# Altium PCB BugBusterMain.PcbDoc (part 6 of 6)
Units mm, origin at the board's own origin, x right, y up, seen from the top; angles counter-clockwise.
Board outline 110 x 80 mm, 6 copper layers (Top Layer, Inner Layer 1, Inner Layer 2, Inner Layer 3, Inner Layer 4, Bottom Layer), stack 1.546 mm thick; 244 components, 246 nets, 1173 pads, 1169 vias.
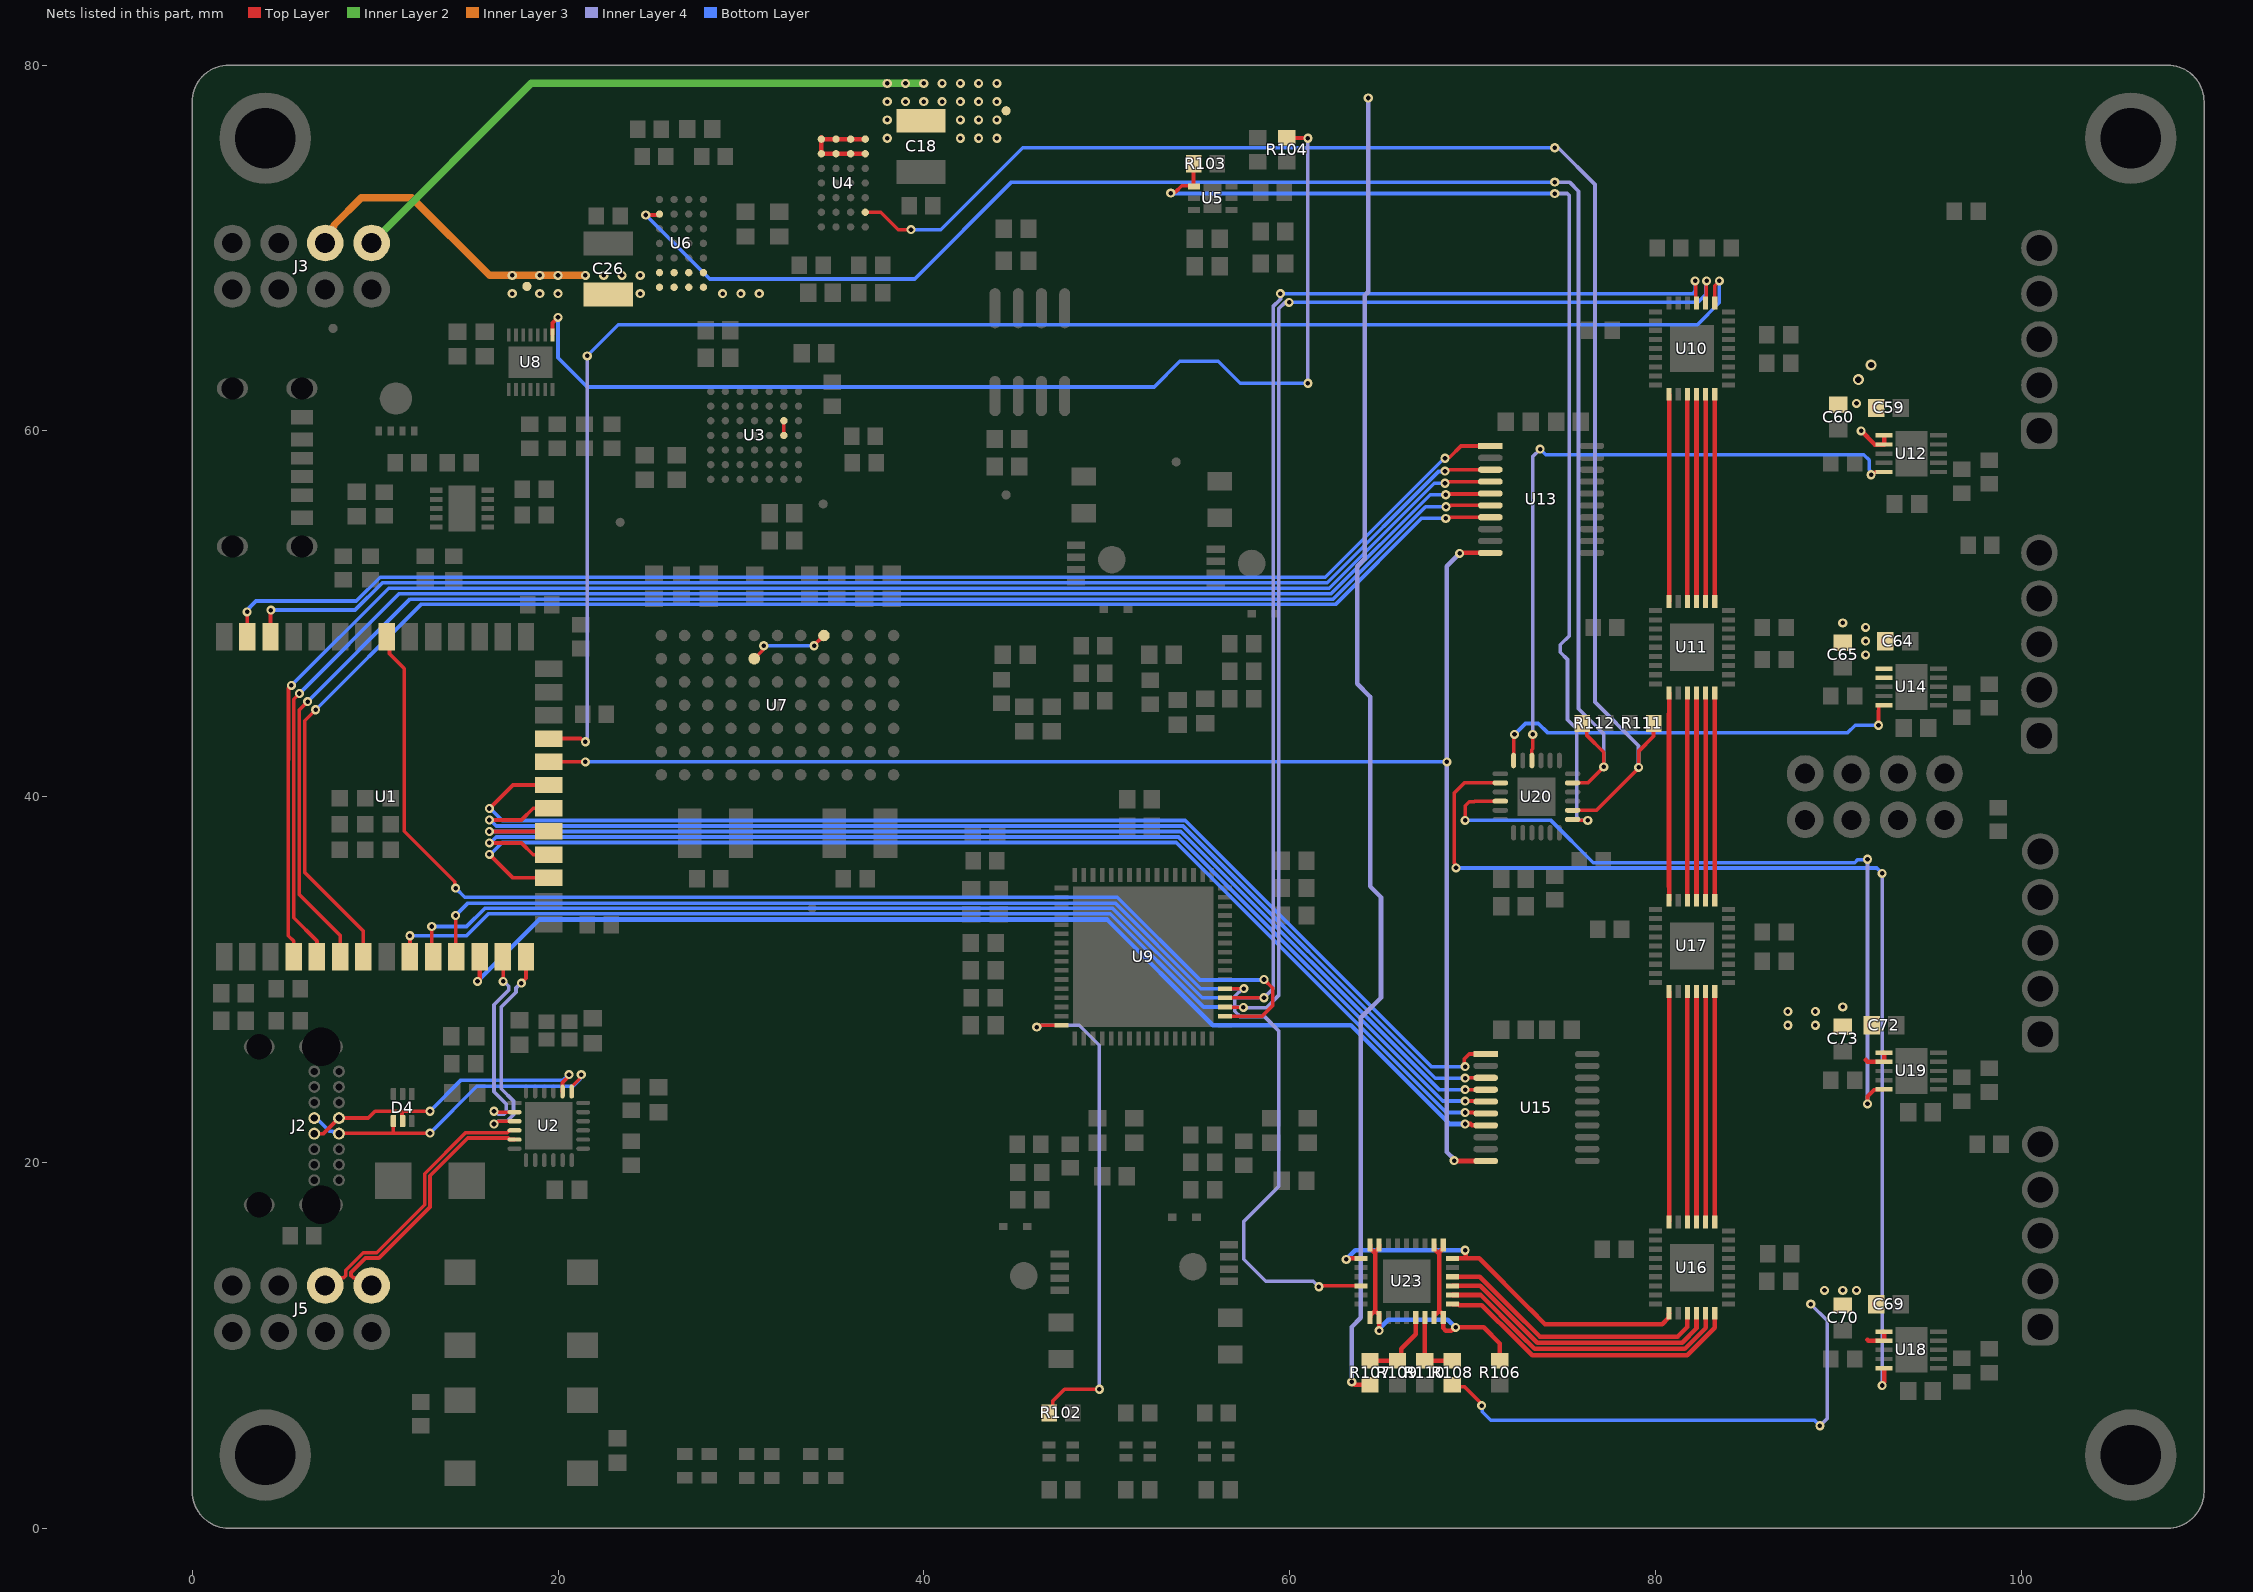
[diagram p8: the nets of this part, all layers, seen from the top]

## Via types
v1: diameter 0.6, hole 0.35, Top Layer to Bottom Layer, tented both sides, 608 vias
v2: diameter 0.5, hole 0.25, Top Layer to Bottom Layer, tented both sides, 555 vias
v3: diameter 0.45, hole 0.25, Top Layer to Bottom Layer, tented both sides, 6 vias

## Nets (pads, with @x,y where several pads share a name; then routed paths per layer and width w, separated by ;. In a path a pad name is that pad's centre, name@x,y a point inside that pad or via, vN(x,y) a via of type N, cw(c..) or ccw(c..) an arc to the next point about the centre after c; other vN are vias at no path point) (continued)
NetR102_1: R102.1 U9.32 | length 27.7
  Top Layer w0.2: v2(46.177,27.4) 46.258,27.4 46.358,27.5 U9.32@47.53,27.5 ; R102.1@46.85,6.3 47.058,6.508 47.058,6.958 47.7,7.6 v2(49.6,7.6)
  Inner Layer 4 w0.2: v2(46.177,27.4) 46.234,27.457 46.402,27.457 46.444,27.5 48.5,27.5 49.6,26.4 v2(49.6,7.6)
NetR103_2: R103.2 U5.4 U20.1 | length 60.6
  Top Layer w0.2: v2(53.5,73) 53.557,73.057 53.757,73.057 54.1,73.4 54.733,73.4 U5.4@54.765,73.368 54.75,73.383 R103.2@54.75,74.6 ; U20.1@75.475,38.75 75.784,38.75 75.834,38.7 v2(76.3,38.7)
  Inner Layer 4 w0.2: v2(74.5,72.973) 75.183,72.973 75.3,72.856 75.3,48.8 74.8,48.3 74.8,47.9 75.2,47.5 75.2,44.2 75.7,43.7 75.7,38.9 75.9,38.7 v2(76.3,38.7)
  Bottom Layer w0.2: v2(53.5,73) 53.527,72.973 v2(74.5,72.973)
NetR104_2: R104.2 U8.8 | length 60.6
  Top Layer w0.2: U8.8@19.7,65.249 19.7,65.9 v2(20,66.2) ; R104.2@59.856,76.014 60.986,76.014 v2(61,76)
  Inner Layer 4 w0.2: v2(61,62.6) v2(61,76)
  Bottom Layer w0.2: v2(20,66.2) 20,64 21.6,62.4 52.6,62.4 54,63.8 56.1,63.8 57.3,62.6 v2(61,62.6)
NetR106_1: R106.1 U23.1 U23.2 U23.8 U23.9 U23.16 U23.17 U23.23 U23.24 | length 21.2
  Top Layer w0.25: U23.16@64.4,11.509 64.4,11.722 64.415,11.737 64.529,11.737 64.675,11.883 ; U23.9@64.4,15.492 64.4,15.278 64.415,15.263 64.437,15.263 64.675,15.025 ; v2(64.898,10.8) 64.9,10.8 64.9,11.722 64.885,11.737 64.821,11.737 64.675,11.883 ; U23.8@64.9,15.492 64.9,15.278 64.885,15.263 64.821,15.263 64.675,15.117 64.675,15.025 ; U23.23@67.9,11.509 67.9,11.722 67.915,11.737 68.054,11.737 68.2,11.883 68.346,11.737 68.385,11.737 68.4,11.722 68.4,10.946 68.546,10.8 68.83,10.8 69.007,10.977 70.623,10.977 71.5,10.1 R106.1@71.5,9.15 ; U23.2@67.9,15.278 U23.2@67.9,15.492 ; U23.2@67.915,15.263 68.088,15.09 68.18,15.09 ; 68.18,11.863 68.18,15.09 ; U23.1@68.4,15.492 68.4,15.278 68.385,15.263 68.354,15.263 68.18,15.09 ; 64.675,11.883 64.675,15.025
  Bottom Layer w0.25: v2(64.898,10.8) 64.898,10.868 65.023,10.993 65.023,11.023 65.4,11.4 68.652,11.4 v2(69.075,10.977)
NetR107_1: R107.1 R109.2 U23.21 | length 4.3
  Top Layer w0.25: R107.1@64.4,9.15 R109.2@65.9,9.15 66.104,9.354 66.104,9.804 66.9,10.6 U23.21@66.9,11.509
NetR108_1: R108.1 R110.2 U23.22 | length 3.9
  Top Layer w0.25: U23.22@67.4,11.509 R110.2@67.4,9.15 R108.1@68.9,9.15
NetR111_1: R111.1 U4.B1 U20.2 | length 83.2
  Top Layer w0.2: U4.B1@36.8,71.95 37.65,71.95 38.6,71 v2(39.3,71) ; U20.2@75.475,39.25 76.779,39.25 79.081,41.552 v2(79.081,41.6) 79.1,41.619 79.1,42.5 79.9,43.3 R111.1@79.9,44
  Inner Layer 4 w0.2: v2(74.5,75.481) 74.692,75.481 76.7,73.473 76.7,45.169 79.081,42.788 v2(79.081,41.6)
  Bottom Layer w0.2: v2(39.3,71) 40.927,71 45.408,75.481 v2(74.5,75.481)
NetR112_1: R112.1 U6.B1 U20.5 | length 92.6
  Top Layer w0.2: v2(24.8,71.8) 25.359,71.8 25.37,71.812 25.512,71.812 U6.B1@25.55,71.85 ; U20.5@75.475,40.75 76.302,40.75 v2(77.176,41.624) 77.176,42.424 76.258,43.342 76.258,43.742 R112.1@76,44
  Inner Layer 4 w0.2: v2(74.5,73.6) 75.3,73.6 75.8,73.1 75.8,44.809 76.789,43.82 76.789,43.807 77.176,43.42 v2(77.176,41.624)
  Bottom Layer w0.2: v2(24.8,71.8) 28.3,68.3 39.5,68.3 44.8,73.6 v2(74.5,73.6)
NetU1_4: U1.4 U13.4 | length 85.2
  Top Layer w0.2: v2(5.42,46.08) 5.261,45.921 5.261,42.011 5.25,42 5.25,32.4 5.55,32.1 U1.4@5.55,31.25 ; v2(68.5,57.131) 68.581,57.131 68.675,57.225 U13.4@70.975,57.225
  Bottom Layer w0.2: v2(5.42,46.08) 10.74,51.4 62.174,51.4 67.905,57.131 v2(68.5,57.131)
NetU1_5: U1.5 U13.5 | length 84.7
  Top Layer w0.2: v2(5.863,45.637) 5.55,45.323 5.55,33.37 6.82,32.1 U1.5@6.82,31.25 ; v2(68.538,56.504) 68.582,56.548 70.948,56.548 U13.5@70.975,56.575
  Bottom Layer w0.2: v2(5.863,45.637) 11.327,51.1 62.283,51.1 67.687,56.504 v2(68.538,56.504)
NetU1_6: U1.6 U13.6 | length 84.2
  Top Layer w0.2: v2(6.307,45.193) 5.85,44.737 5.85,34.65 8.09,32.41 U1.6@8.09,31.25 ; v2(68.555,55.847) 68.612,55.904 68.801,55.904 68.822,55.925 U13.6@70.975,55.925
  Bottom Layer w0.2: v2(6.307,45.193) 11.913,50.8 62.391,50.8 67.438,55.847 v2(68.555,55.847)
NetU1_7: U1.7 U13.7 | length 83.7
  Top Layer w0.2: v2(6.75,44.75) 6.15,44.15 6.15,35.85 9.36,32.64 U1.7@9.36,31.25 ; v2(68.536,55.214) 68.593,55.272 68.8,55.272 68.803,55.275 U13.7@70.975,55.275
  Bottom Layer w0.2: v2(6.75,44.75) 12.511,50.511 62.511,50.511 67.214,55.214 v2(68.536,55.214)
NetU1_9: U1.9 U9.51 U10.26 | length 115.8
  Top Layer w0.2: U1.9@11.9,31.25 11.905,31.255 v2(11.905,32.395) ; U9.51@56.47,28.5 56.482,28.488 57.466,28.488 v2(57.477,28.477) ; U10.26@82.75,66.999 82.79,67.04 82.79,68.19 v2(82.8,68.2)
  Inner Layer 4 w0.2: v2(57.477,28.477) 57.492,28.462 58.737,28.462 59.4,29.125 59.4,66.676 59.747,67.022 v2(59.978,67.022)
  Bottom Layer w0.2: v2(11.905,32.395) 14.995,32.395 16.2,33.6 50.2,33.6 55.3,28.5 57.454,28.5 v2(57.477,28.477) ; v2(59.978,67.022) 82.322,67.022 82.765,67.465 82.765,68.165 v2(82.8,68.2)
NetU1_10: U1.10 U9.52 U10.27 | length 115.2
  Top Layer w0.2: v2(13.1,32.9) 13.1,31.32 U1.10@13.17,31.25 ; U9.52@56.47,29 v2(58.6,29) ; v2(82.173,68.2) 82.212,68.161 82.212,66.925 U10.27@82.233,66.903
  Inner Layer 4 w0.2: v2(58.6,29) 59.1,29.5 59.1,66.8 59.5,67.2 v2(59.5,67.5)
  Bottom Layer w0.2: v2(13.1,32.9) 15,32.9 15.989,33.889 50.335,33.889 55.224,29 v2(58.6,29) ; v2(59.5,67.5) 82.056,67.5 82.173,67.617 v2(82.173,68.2)
NetU1_11: U1.11 U9.53 U23.13 | length 73.3
  Top Layer w0.2: v2(14.4,33.5) 14.4,31.29 U1.11@14.44,31.25 ; U9.53@56.47,29.5 v2(57.5,29.5) ; v2(61.6,13.2) 61.65,13.25 U23.13@63.9,13.25
  Inner Layer 4 w0.2: v2(57.5,29.5) 57.422,29.5 57,29.079 57,28.265 57.288,27.977 58.623,27.977 59.4,27.2 59.4,18.675 57.5,16.775 57.5,14.7 58.7,13.5 61.3,13.5 v2(61.6,13.2)
  Bottom Layer w0.2: v2(14.4,33.5) 15.078,34.178 50.471,34.178 55.149,29.5 v2(57.5,29.5)
NetU1_12: U1.12 U15.7 | length 62.6
  Top Layer w0.25: v2(15.6,29.9) 15.71,30.01 U1.12@15.71,31.25 ; v2(69.6,22.1) 69.9,22.1 69.975,22.025 U15.7@70.725,22.025
  Bottom Layer w0.25: v2(15.6,29.9) 18.98,33.28 50.02,33.28 55.8,27.5 63.356,27.5 68.756,22.1 v2(69.6,22.1)
NetU1_17: U1.17 U15.6 | length 64.7
  Top Layer w0.2: v2(16.25,36.841) 17.536,35.555 U1.17@19.5,35.555 ; v2(69.6,22.727) 70.066,22.727 70.091,22.702 70.698,22.702 U15.6@70.725,22.675
  Bottom Layer w0.2: v2(16.25,36.841) 16.298,36.841 16.727,37.27 16.952,37.495 53.805,37.495 68.573,22.727 v2(69.6,22.727)
NetU1_18: U1.18 U15.5 | length 64.1
  Top Layer w0.2: v2(16.25,37.468) 18.007,37.468 18.65,36.825 U1.18@19.5,36.825 ; v2(69.6,23.354) 70.089,23.354 70.091,23.352 70.698,23.352 U15.5@70.725,23.325
  Bottom Layer w0.2: v2(16.25,37.468) 16.298,37.468 16.625,37.795 53.929,37.795 68.37,23.354 v2(69.6,23.354)
NetU1_19: U1.19 U15.4 | length 63.6
  Top Layer w0.2: v2(16.25,38.095) U1.19@19.5,38.095 ; v2(69.6,23.981) 70.719,23.981 U15.4@70.725,23.975
  Bottom Layer w0.2: v2(16.25,38.095) 54.054,38.095 68.168,23.981 v2(69.6,23.981)
NetU1_20: U1.20 U15.3 | length 63.8
  Top Layer w0.2: v2(16.25,38.722) 18.007,38.722 18.65,39.365 U1.20@19.5,39.365 ; v2(69.6,24.608) 69.617,24.625 U15.3@70.725,24.625
  Bottom Layer w0.2: v2(16.25,38.722) 16.298,38.722 16.625,38.395 54.178,38.395 67.965,24.608 v2(69.6,24.608)
NetU1_21: U1.21 U15.1 | length 64.7
  Top Layer w0.2: v2(16.25,39.349) 17.536,40.635 U1.21@19.5,40.635 ; v2(69.6,25.235) 69.556,25.279 69.556,25.656 69.825,25.925 U15.1@70.725,25.925
  Bottom Layer w0.2: v2(16.25,39.349) 16.298,39.349 16.952,38.695 54.302,38.695 67.762,25.235 v2(69.6,25.235)
NetU1_22: U1.22 U13.10 U15.10 | length 86.2
  Top Layer w0.2: U1.22@19.5,41.905 21.495,41.905 v2(21.5,41.9)
  Top Layer w0.25: v2(69,20.1) 69.025,20.075 U15.10@70.725,20.075 ; v2(69.3,53.3) 69.325,53.325 U13.10@70.975,53.325
  Inner Layer 4 w0.25: v2(69,20.1) 69,20.168 68.598,20.57 68.598,52.598 v2(69.3,53.3)
  Bottom Layer w0.2: v2(21.5,41.9) v2(68.6,41.9)
NetU1_23: U1.23 U10.25 | length 88.8
  Top Layer w0.2: U1.23@19.5,43.175 21.244,43.175 21.419,43 v2(21.5,43) ; U10.25@83.25,66.999 83.25,67.933 83.5,68.183 v2(83.5,68.2)
  Inner Layer 4 w0.2: v2(21.5,43) 21.5,43.081 21.6,43.181 v2(21.6,64.1)
  Bottom Layer w0.2: v2(21.6,64.1) 23.3,65.8 82.3,65.8 83.5,67 v2(83.5,68.2)
NetU1_33: U1.33 U9.50 | length 66.1
  Top Layer w0.2: U1.33@10.63,48.75 10.783,48.597 10.783,47.817 11.6,47 11.6,38.1 14.361,35.339 14.361,35.039 v2(14.4,35) ; U9.50@56.47,28 58.5,28 59.077,28.577 59.077,29.523 v2(58.6,30)
  Bottom Layer w0.2: v2(14.4,35) 14.9,34.5 50.583,34.5 55.106,29.977 58.577,29.977 v2(58.6,30)
NetU1_38: U1.38 U13.3 | length 71.3
  Top Layer w0.2: U1.38@4.28,48.75 4.28,50.18 v2(4.3,50.2) ; v2(68.5,57.8) 68.581,57.8 68.656,57.875 U13.3@70.975,57.875
  Bottom Layer w0.2: v2(4.3,50.2) 8.9,50.2 10.4,51.7 62.066,51.7 68.144,57.778 68.478,57.778 v2(68.5,57.8)
NetU1_39: U1.39 U13.1 | length 73.2
  Top Layer w0.2: v2(3,50.1) 3.01,50.09 U1.39@3.01,48.75 ; v2(68.5,58.5) 68.557,58.557 68.757,58.557 69.375,59.175 U13.1@70.975,59.175
  Bottom Layer w0.2: v2(3,50.1) 3,50.181 3.131,50.312 3.131,50.347 3.484,50.7 8.976,50.7 10.276,52 61.957,52 68.457,58.5 v2(68.5,58.5)
NetU3_C6: U3.C6 U3.D6 | length 0.8
  Top Layer w0.2: U3.D6@32.35,59.75 U3.C6@32.35,60.55
NetU7_E6: U7.E6 U7.H7 | length 4.5
  Top Layer w0.2: U7.E6@30.73,47.54 31.193,48.003 31.193,48.193 v2(31.25,48.25) ; v2(34,48.25) 34,48.27 U7.H7@34.54,48.81
  Bottom Layer w0.2: v2(31.25,48.25) v2(34,48.25)
NetU10_10: U10.10 U11.30 | length 11.3
  Top Layer w0.25: U11.30@80.75,50.666 U10.10@80.75,62
NetU10_12: U10.12 U11.28 | length 11.3
  Top Layer w0.25: U11.28@81.75,50.666 U10.12@81.75,62
NetU10_13: U10.13 U11.27 | length 11.3
  Top Layer w0.25: U11.27@82.25,50.666 U10.13@82.25,62
NetU10_14: U10.14 U11.26 | length 11.3
  Top Layer w0.25: U11.26@82.75,50.666 U10.14@82.75,62
NetU10_15: U10.15 U11.25 | length 11.3
  Top Layer w0.25: U11.25@83.25,50.666 U10.15@83.25,62
NetU11_10: U11.10 U17.30 | length 11.3
  Top Layer w0.25: U17.30@80.75,34.333 80.75,35.061 80.746,35.065 80.746,44.531 80.75,44.535 U11.10@80.75,45.667
NetU11_12: U11.12 U17.28 | length 11.3
  Top Layer w0.25: U17.28@81.75,34.333 81.75,39.546 81.752,39.548 81.752,44.533 81.75,44.535 U11.12@81.75,45.667
NetU11_13: U11.13 U17.27 | length 11.3
  Top Layer w0.25: U17.27@82.25,34.333 U11.13@82.25,45.667
NetU11_14: U11.14 U17.26 | length 11.3
  Top Layer w0.25: U17.26@82.75,34.333 U11.14@82.75,45.667
NetU11_15: U11.15 U17.25 | length 11.3
  Top Layer w0.25: U17.25@83.25,34.333 U11.15@83.25,45.667
NetU12_5: U12.5 U20.10 | length 37.1
  Top Layer w0.2: U20.10@73.25,41.975 73.237,41.988 73.237,42.563 73.3,42.625 v2(73.3,43.4) ; v2(91.8,57.6) 91.881,57.6 92.012,57.73 92.49,57.73 U12.5@92.509,57.75
  Inner Layer 4 w0.2: v2(73.3,43.4) 73.3,58.6 v2(73.7,59)
  Bottom Layer w0.2: v2(73.7,59) 74,58.7 91.4,58.7 91.7,58.4 91.7,57.867 91.743,57.825 91.743,57.657 v2(91.8,57.6)
NetU14_5: U14.5 U20.12 | length 23.4
  Top Layer w0.2: U20.12@72.25,41.975 72.25,43.35 v2(72.3,43.4) ; v2(92.2,43.9) 92.2,44.691 92.207,44.698 92.207,44.98 92.227,45 U14.5@92.509,45
  Bottom Layer w0.2: v2(72.3,43.4) 72.9,44 73.6,44 74.1,43.5 90.525,43.5 90.925,43.9 v2(92.2,43.9)
NetU16_10: U16.10 U23.10 U23.30 | length 21.7
  Top Layer w0.25: v2(63.1,14.7) 63.168,14.7 63.218,14.75 U23.10@63.9,14.75 ; U23.30@68.899,14.75 69.631,14.75 ; v2(69.6,15.2) 69.631,15.169 69.631,14.75 ; U16.10@80.75,11.75 80.735,11.735 80.735,11.522 80.368,11.156 73.966,11.156 73.152,11.969 73.143,11.969 70.363,14.75 69.631,14.75
  Bottom Layer w0.25: v2(63.1,14.7) 63.6,15.2 v2(69.6,15.2)
NetU16_12: U16.12 U23.28 | length 15.2
  Top Layer w0.25: U23.28@68.899,13.75 70.404,13.75 72.863,11.292 72.871,11.292 73.685,10.478 81.228,10.478 81.75,11 U16.12@81.75,11.75
NetU16_13: U16.13 U23.27 | length 15.8
  Top Layer w0.25: U23.27@68.899,13.25 70.425,13.25 72.722,10.953 72.731,10.953 73.545,10.139 81.462,10.139 82.25,10.927 U16.13@82.25,11.75
NetU16_14: U16.14 U23.26 | length 16.4
  Top Layer w0.25: U23.26@68.899,12.75 70.446,12.75 72.582,10.614 72.59,10.614 73.404,9.8 81.602,9.8 82.75,10.948 U16.14@82.75,11.75
NetU16_15: U16.15 U23.25 | length 16.9
  Top Layer w0.25: U23.25@68.899,12.25 68.915,12.235 69.231,12.235 69.266,12.2 70.516,12.2 72.441,10.275 72.45,10.275 73.275,9.45 81.75,9.45 83.25,10.95 U16.15@83.25,11.75
NetU16_25: U16.25 U17.15 | length 12.6
  Top Layer w0.25: U16.25@83.25,16.749 U17.15@83.25,29.334
NetU16_26: U16.26 U17.14 | length 12.6
  Top Layer w0.25: U16.26@82.75,16.749 U17.14@82.75,29.334
NetU16_27: U16.27 U17.13 | length 12.6
  Top Layer w0.25: U16.27@82.25,16.749 U17.13@82.25,29.334
NetU16_28: U16.28 U17.12 | length 12.6
  Top Layer w0.25: U16.28@81.75,16.749 U17.12@81.75,29.334
NetU16_30: U16.30 U17.10 | length 12.6
  Top Layer w0.25: U16.30@80.75,16.749 U17.10@80.75,29.334
NetU18_5: U18.5 U20.14 | length 59.3
  Top Layer w0.2: v2(69.1,36.1) 69.043,36.157 69.043,36.325 69,36.367 69,40.2 69.55,40.75 U20.14@71.525,40.75
  Top Layer w0.25: v2(92.4,7.8) 92.4,7.868 92.509,7.977 U18.5@92.509,8.75
  Inner Layer 4 w0.2: v2(92.4,7.8) v2(92.4,35.8)
  Bottom Layer w0.2: v2@69.168,36.1 92.1,36.1 v2(92.4,35.8)
  Bottom Layer w0.25: v2(69.1,36.1) v2@69.168,36.1 ; v2@92.386,35.786 v2(92.4,35.8)
NetU19_5: U19.5 U20.16 | length 40.7
  Top Layer w0.2: v2(69.6,38.7) 69.6,39.5 69.823,39.723 70.098,39.723 70.125,39.75 U20.16@71.525,39.75 ; v2(91.6,23.2) 91.6,23.6 91.98,23.98 92.49,23.98 U19.5@92.509,24
  Inner Layer 4 w0.2: v2(91.6,23.2) v2(91.6,36.577)
  Bottom Layer w0.2: v2(69.6,38.7) 74.3,38.7 76.611,36.389 90.898,36.389 91.05,36.541 91.564,36.541 v2(91.6,36.577)
USB_DF1_N: U1.13 U2.2 | length 11.2
  Top Layer w0.2: v2(16.5,22.8) 16.55,22.75 U2.2@17.624,22.75 ; U1.13@16.98,31.25 17,31.23 v2(17,29.9)
  Inner Layer 4 w0.2: v2(16.5,22.8) 16.581,22.8 16.731,22.65 17.05,22.65 17.167,22.767 17.167,23.193 16.5,23.861 16.5,28.622 17.057,29.179 17.3,29.422 17.3,29.633 17.033,29.9 v2(17,29.9)
USB_DF1_P: U1.14 U2.3 | length 12
  Top Layer w0.2: v2(16.5,22.1) 16.581,22.1 16.731,22.25 U2.3@17.624,22.25 ; v2(18,29.8) 18,29.817 18.25,30.067 U1.14@18.25,31.25
  Inner Layer 4 w0.2: v2(16.5,22.1) 16.581,22.1 16.731,22.25 17.216,22.25 17.567,22.601 17.567,23.359 16.9,24.026 16.9,28.5 17.7,29.3 17.7,29.533 17.967,29.8 v2(18,29.8)
USB_DF2_N: J5.2 U2.4 | length 15
  Top Layer w0.2: J5.2@7.27,13.27 7.757,13.27 8.187,13.7 8.278,13.7 8.396,13.817 8.396,14.103 9.352,15.059 10.087,15.059 12.711,17.683 12.711,19.387 14.945,21.62 17.223,21.62 17.353,21.75 U2.4@17.624,21.75
USB_DF2_P: J5.1 U2.5 | length 14.5
  Top Layer w0.2: J5.1@9.81,13.27 9.323,13.27 8.893,13.7 8.802,13.7 8.684,13.817 8.684,13.983 9.472,14.77 10.207,14.77 13,17.563 13,19.267 15.064,21.332 17.271,21.332 17.353,21.25 U2.5@17.624,21.25
USB_UP_N: D4.1 J2.A7 J2.B7 U2.19 | length 18.2
  Top Layer w0.2: J2.A7@8.025,21.575 8.05,21.6 11,21.6 ; D4.1@11,22.26 11,21.6 ; v2(13,21.6) 11,21.6 ; U2.19@20.75,23.876 20.75,24.136 21.216,24.602 21.216,24.743 v2(21.273,24.8)
  Bottom Layer w0.2: J2.B7@6.675,22.425 6.775,22.425 7.5,21.7 7.683,21.7 7.722,21.661 7.939,21.661 J2.A7@8.025,21.575 ; v2(13,21.6) 15.561,24.161 20.827,24.161 21.216,24.55 21.216,24.743 v2(21.273,24.8)
USB_UP_P: D4.2 J2.A6 J2.B6 U2.20 | length 16.9
  Top Layer w0.2: J2.B6@6.675,21.575 7.175,21.575 J2.A6@8.025,22.425 9.625,22.425 10,22.8 11.383,22.8 ; D4.2@11.5,22.26 11.471,22.289 11.471,22.712 11.383,22.8 ; v2(13,22.8) 11.471,22.8 11.383,22.8 ; U2.20@20.25,23.876 20.25,24.372 20.6,24.722 v2(20.6,24.8)
  Bottom Layer w0.2: v2(13,22.8) 14.7,24.5 20.3,24.5 v2(20.6,24.8)
VADJ1_BUCK: C18.2 C59.2 C60.2 C64.2 C65.2 J3.1 pad.10 R107.2 U4.F1 U4.F2 U4.F3 U4.F4 U4.G1 U4.G2 U4.G3 U4.G4 U12.1 U12.2 U14.1 U14.2 | length 114.3
  Top Layer w0.25: U4.F1@36.8,75.15 U4.F2@36,75.15 U4.F3@35.2,75.15 U4.F4@34.4,75.15 34.4,76.045 34.495,75.95 U4.G1@36.8,75.95 ; v2(63.4,8) 63.55,7.85 R107.2@64.4,7.85 ; v2(91.25,60) 92,59.25 U12.2@92.509,59.25 U12.1@92.509,59.75
  Inner Layer 2 w0.4: J3.1@9.81,70.27 18.54,79 v2(40,79)
  Inner Layer 4 w0.25: v2(63.4,8) 63.4,11 63.9,11.5 63.9,27.9 65,29 65,34.5 64.4,35.1 64.4,45.469 63.698,46.171 63.698,52.598 64.1,53 64.1,67.4 64.3,67.6 v2(64.3,78.2)
  other v1: 91.1,62.8 91.8,63.6
  other v2: 91.5,47.75 91.5,48.5 91.5,49.25 90.25,49.5 91,61.5 38,76 42,76 43,76 44,76 38,77 42,77 43,77 44,77 38,78 39,78 40,78 41,78 42,78 43,78 44,78 38,79 39,79 41,79 42,79 43,79 44,79
VADJ2_BUCK: C26.2 C69.2 C70.2 C72.2 C73.2 J3.2 pad.9 R108.2 U6.F1 U6.F2 U6.F3 U6.F4 U6.G1 U6.G2 U6.G3 U6.G4 U18.1 U18.2 U19.1 U19.2 | length 48.7
  Top Layer w0.2: R108.2@68.9,7.85 69.008,7.742 69.558,7.742 70.4,6.9 70.4,6.881 70.5,6.781 v2(70.5,6.7)
  Top Layer w0.25: 91.5,25.6 91.6,25.5 U19.2@92.509,25.5 U19.1@92.509,26 ; 91.6,10.3 91.65,10.25 U18.2@92.509,10.25 U18.1@92.509,10.75
  Inner Layer 3 w0.4: J3.2@7.27,70.27 7.27,70.703 7.751,71.184 7.751,71.251 9.25,72.75 12,72.75 16.25,68.5 v2(21.5,68.5)
  Inner Layer 4 w0.2: v2(88.5,12.25) 89.4,11.35 89.4,6 v2(89,5.6)
  Bottom Layer w0.2: v2(70.5,6.7) 70.539,6.661 70.539,6.361 71,5.9 88.7,5.9 v2(89,5.6)
  other v2: 89.25,13 90.25,13 91,13 87.25,27.5 88.75,27.5 87.25,28.25 88.75,28.25 90.25,28.5 17.5,67.5 19,67.5 20,67.5 24.5,67.5 29,67.5 30,67.5 31,67.5 17.5,68.5 19,68.5 20,68.5 22.5,68.5 23.5,68.5 24.5,68.5
pads on no net: D3.1 D4.3 D4.6 J2.A8 J2.B8 U1.16 U1.28 U1.29 U1.30 U2.6 U2.7 U2.8 U2.11 U2.12 U3.A2 U3.A6 U3.B1 U3.C1 U3.D1 U4.B2 U5.5 U6.B2 U7.D7 U7.F3 U7.F4 U7.G6 U8.14 U10.20 U11.20 U12.7 U13.8 U13.9 U13.12 U13.13 U14.7 U15.8 U15.9 U15.12 U15.13 U16.20 U17.20 U18.7 U19.7 U21.1 U21.3 U21.5 U21.7 U21.8 U22.2 U22.3 U23.12 U23.14 U23.15 U23.20
copper on no net: | length 16.7
  Top Layer w0.2: 18.873,25.3 17.4,25.3 16.9,25.8 16.9,28.5 17.5,29.1 22.3,29.1 23,28.4 23,27.8 23,26 22.6,25.6 22.3,25.3 20.5,25.3

## Polygon pours and split planes (outlines as drawn)
no net on Top Overlay "NETC9" (none): 30.877,19.027 33.9,19.027 cw(c33.9,18.9) 34.027,18.9 34.027,15.903 34.053,15.877 34.473,15.877 34.473,18.9 cw(c34.6,18.9) 34.6,19.027 37.623,19.027 37.623,19.373 34.6,19.373 cw(c34.6,19.5) 34.473,19.5 34.473,22.573 34.027,22.573 34.027,19.5 cw(c33.9,19.5) 33.9,19.373 30.877,19.373
no net on Top Overlay "NETC9" (solid): 29.05,16.2 34.25,13.2 39.45,16.2 39.45,22.2 34.25,25.2 29.05,22.2
GND on Top Layer "NETC9" (solid, remove dead copper, pour order 42): 108,0 ccw(c108,2) 110,2 110,78 ccw(c108,78) 108,80 2,80 ccw(c2,78) 0,78 0,2 ccw(c2,2) 2,0
20V_USB on Top Layer "NETC9" (solid, remove dead copper, pour order 7): 32.753,71.386 32.939,71.2 33.988,71.2 34.131,71.332 cw(c34.505,71.207) 34.505,71.601 34.799,71.601 ccw(c34.799,71.802) 35,71.802 35,72.604 ccw(c34.565,72.604) 34.565,73.039 34.457,73.039 cw(c34.457,73.496) 34,73.496 34,73.5 ccw(c33.5,73.5) 33.5,74 28,74 ccw(c28,73.5) 27.5,73.5 27.5,71 ccw(c28,71) 28,70.5 29,70.5 ccw(c29,71) 29.5,71 cw(c29.925,71) 29.925,71.425 32.575,71.425 cw(c32.575,71)
3V3_BUCK on Top Layer "NETC9" (solid, remove dead copper, pour order 29): 32,58 cw(c32.5,58) 32.5,58.5 35,58.5 cw(c35,58) 35.5,58 35.5,54 cw(c35,54) 35,53.5 32.5,53.5 cw(c32.5,54) 32,54
5V_BUCK on Top Layer "NETC9" (solid, remove dead copper, pour order 24): 23,55 23,57.5 cw(c23.5,57.5) 23.5,58 27.25,58 ccw(c27.25,58.25) 27.5,58.25 cw(c27.75,58.25) 27.75,58.5 29,58.5 cw(c29,58) 29.5,58 29.5,55 cw(c29,55) 29,54.5 23.5,54.5 cw(c23.5,55)
VADJ2_BUCK on Top Layer "NETC9" (solid, remove dead copper, pour order 12): 31.5,69 cw(c31.5,68.5) 32,68.5 32,67.5 cw(c31.5,67.5) 31.5,67 17,67 cw(c17,67.5) 16.5,67.5 16.5,68.5 cw(c17,68.5) 17,69
VADJ1_BUCK on Top Layer "NETC9" (solid, remove dead copper, pour order 9): 34,75 ccw(c34.25,75) 34.25,74.75 37.5,74.75 ccw(c37.5,75) 37.75,75 cw(c38,75) 38,75.25 44.75,75.25 ccw(c44.75,75.5) 45,75.5 45,79.25 ccw(c44.75,79.25) 44.75,79.5 34.25,79.5 ccw(c34.25,79.25) 34,79.25
VADJ1_BUCK on Top Layer "NETC9" (solid, pour order 0): 89.2,61.1 91.1,59.2 92.7,59.2 92.9,59.4 92.9,64.5 91.8,64.5 89.2,61.9 89.2,61.5
3V3_ADJ on Top Layer "NETC9" (solid, pour order 1): 56.8,71.5 56.8,67 59,67 59,71.5
+15V_ANA on Top Layer "NETC9" (solid, remove dead copper, pour order 41): 47.55,8 cw(c47.55,8.6) 46.95,8.6 46.95,9.9 cw(c47.75,9.9) 47.75,10.7 56.85,10.7 cw(c56.85,10.1) 57.45,10.1 57.45,8.5 cw(c56.95,8.5) 56.95,8
+15V_ANA on Top Layer "NETC9" (solid, remove dead copper, pour order 40): 47.9,56.6 cw(c47.9,57.2) 47.3,57.2 47.3,58.5 cw(c48.1,58.5) 48.1,59.3 57.2,59.3 cw(c57.2,58.7) 57.8,58.7 57.8,57.1 cw(c57.3,57.1) 57.3,56.6
3V3_BUCK on Top Layer "NETC9" (solid, remove dead copper, pour order 26): 2.3,27.4 2.3,42 cw(c2.7,42) 2.7,42.4 3.9,42.4 cw(c3.9,42.1) 4.2,42.1 4.2,33.1 cw(c3.7,33.1) 3.7,32.6 ccw(c3.7,32.4) 3.5,32.4 3.5,27.4 cw(c3.3,27.4) 3.3,27.2 2.5,27.2 cw(c2.5,27.4)
NetJ1_A9 on Top Layer "NETC9" (solid, remove dead copper, pour order 3): 5,59.5 cw(c5.5,59.5) 5.5,60 9.75,60 ccw(c9.75,60.25) 10,60.25 cw(c10.25,60.25) 10.25,60.5 11.5,60.5 cw(c11.5,60.25) 11.75,60.25 11.75,57.5 cw(c11.5,57.5) 11.5,57.25 8.5,57.25 ccw(c8.5,57) 8.25,57 cw(c7.25,57) 7.25,56 5.5,56 cw(c5.5,56.5) 5,56.5
+15V_ANA on Top Layer "NETC9" (solid, remove dead copper, pour order 34): 25,42.25 cw(c25.75,42.25) 25.75,43 27,43 cw(c27,42.5) 27.5,42.5 27.5,40.25 ccw(c27.75,40.25) 27.75,40 cw(c27.75,39.75) 28,39.75 28,30.5 cw(c27.25,30.5) 27.25,29.75 24.25,29.75 cw(c24.25,30.5) 23.5,30.5 23.5,32.5 cw(c24.25,32.5) 24.25,33.25 ccw(c24.25,34) 25,34 25,38.25
-15V_ANA on Top Layer "NETC9" (solid, remove dead copper, pour order 33): 36.652,32.76 36.74,32.76 cw(c36.74,32.5) 37,32.5 37,30.5 cw(c36.75,30.5) 36.75,30.25 33.25,30.25 cw(c33.25,30.5) 33,30.5 33,42.5 cw(c33.25,42.5) 33.25,42.75 36,42.75 cw(c36,42.5) 36.25,42.5 36.25,33.25 ccw(c36.75,33.25)
20V_USB on Top Layer "NETC9" (solid, remove dead copper, pour order 4): 9.95,60.77 cw(c9.95,61.72) 9,61.72 9,64.25 ccw(c8.5,64.25) 8.5,64.75 4.25,64.75 cw(c4.25,65.25) 3.75,65.25 3.75,68.25 cw(c4.5,68.25) 4.5,69 5.25,69 cw(c5.25,68.25) 6,68.25 6,67.25 ccw(c6.75,67.25) 6.75,66.5 11.75,66.5 cw(c11.75,65.25) 13,65.25 13,61.5 cw(c12.25,61.5) 12.25,60.75
VADJ2_BUCK on Top Layer "NETC9" (solid, remove dead copper, pour order 32): 91.401,10.095 91.799,10.095 cw(c91.799,10) 91.894,10 92.9,10 ccw(c92.9,10.2) 93.1,10.2 93.1,13.3 ccw(c92.9,13.3) 92.9,13.5 87.3,13.5 ccw(c87.3,13.1) 86.9,13.1 86.9,12.1 ccw(c87.3,12.1) 87.3,11.7 90.6,11.7 cw(c90.6,11.3) 91,11.3 91,10.6 ccw(c91.5,10.6) 91.5,10.1
VADJ2_BUCK on Top Layer "NETC9" (solid, remove dead copper, pour order 31): 91.401,25.345 91.799,25.345 cw(c91.799,25.25) 91.894,25.25 92.9,25.25 ccw(c92.9,25.45) 93.1,25.45 93.1,28.55 ccw(c92.9,28.55) 92.9,28.75 87.3,28.75 ccw(c87.3,28.35) 86.9,28.35 86.9,27.35 ccw(c87.3,27.35) 87.3,26.95 90.6,26.95 cw(c90.6,26.55) 91,26.55 91,25.85 ccw(c91.5,25.85) 91.5,25.35
VADJ1_BUCK on Top Layer "NETC9" (solid, remove dead copper, pour order 30): 91,46.3 91.2,46.1 92.7,46.1 93.1,46.5 93.1,49.55 ccw(c92.9,49.55) 92.9,49.75 87.3,49.75 ccw(c87.3,49.35) 86.9,49.35 86.9,48.35 ccw(c87.3,48.35) 87.3,47.95 90.6,47.95 cw(c90.6,47.55) 91,47.55
3V3_BUCK on Top Layer "NETC9" (solid, remove dead copper, pour order 27): 57.6,38.1 cw(c58.1,38.1) 58.1,38.6 60.1,38.6 cw(c60.1,38.1) 60.6,38.1 60.6,34.8 cw(c60.4,34.8) 60.4,34.6 59,34.6 59,36.5 ccw(c58.5,36.5) 58.5,37 58.2,37 cw(c58.2,37.6) 57.6,37.6
5V_BUCK on Top Layer "NETC9" (solid, remove dead copper, pour order 25): 44.5,34.5 40,34.5 cw(c40,35) 39.5,35 39.5,36.5 cw(c40,36.5) 40,37 41.5,37 cw(c41.5,36.5) 42,36.5 42,36 ccw(c42.5,36) 42.5,35.5 44.5,35.5
5V_BUCK on Top Layer "NETC9" (solid, remove dead copper, pour order 18): 45,71.125 cw(c45.525,71.125) 45.525,71.65 47.85,71.65 cw(c47.85,71) 48.5,71 48.5,68.5 cw(c48,68.5) 48,68 45.5,68 cw(c45.5,68.5) 45,68.5
5V_BUCK on Top Layer "NETC9" (solid, remove dead copper, pour order 16): 37.5,51 37.5,46 ccw(c38,46) 38,45.5 40.5,45.5 ccw(c40.5,46) 41,46 41,53.5 ccw(c40.5,53.5) 40.5,54 39.5,54 ccw(c39.5,53.5) 39,53.5 39,52 cw(c38.5,52) 38.5,51.5 38,51.5 ccw(c38,51)
5V_BUCK on Top Layer "NETC9" (solid, remove dead copper, pour order 15): 23,53 23,46 ccw(c23.5,46) 23.5,45.5 25.5,45.5 ccw(c25.5,46) 26,46 26,51 ccw(c25.5,51) 25.5,51.5 25,51.5 cw(c25,52) 24.5,52 24.5,53 ccw(c24,53) 24,53.5 23.5,53.5 ccw(c23.5,53)
5V_BUCK on Top Layer "NETC9" (solid, remove dead copper, pour order 14): 16.5,20.5 cw(c16.5,20) 17,20 17,17 cw(c16.5,17) 16.5,16.5 13.5,16.5 cw(c13.5,17) 13,17 13,20 cw(c13.5,20) 13.5,20.5
20V_USB on Top Layer "NETC9" (solid, remove dead copper, pour order 13): 29,66 cw(c29.5,66) 29.5,66.5 32.5,66.5 cw(c32.5,66) 33,66 33,62 cw(c32.739,62) 32.739,61.739 29.761,61.739 cw(c29.761,62) 29.5,62 29.5,64.5 ccw(c29,64.5) 29,65
GND on Inner Layer 2 "NETC9" (solid, remove dead copper, pour order 36): 108,0 ccw(c108,2) 110,2 110,78 ccw(c108,78) 108,80 2,80 ccw(c2,78) 0,78 0,2 ccw(c2,2) 2,0
3V3_BUCK on Inner Layer 2 "NETC9" (solid, remove dead copper, pour order 21): 23,58 cw(c23.95,58) 23.95,58.95 29.246,58.95 cw(c29.246,58.1) 30.096,58.1 30.096,54.404 ccw(c30.5,54.404) 30.5,54 38,54 ccw(c38,55.5) 39.5,55.5 39.5,62.5 ccw(c38.5,62.5) 38.5,63.5 17.404,63.5 cw(c17.452,64.452) 16.5,64.5 16.5,77.5 ccw(c15,77.5) 15,79 3,79 ccw(c3,76.5) 0.5,76.5 0.5,3.54 ccw(c3.04,3.54) 3.04,1 81.5,1 ccw(c81.5,2) 82.5,2 82.5,62 ccw(c80,62) 80,64.5 47.5,64.5 ccw(c47.5,62) 45,62 45,26 cw(c44,26) 44,25 34,25 ccw(c34,23.5) 32.5,23.5 32.5,21 cw(c31.5,21) 31.5,20 18.5,20 ccw(c18.5,19) 17.5,19 17.5,17 cw(c16.5,17) 16.5,16 12,16 cw(c12,17) 11,17 11,26 cw(c12.5,26) 12.5,27.5 22,27.5 ccw(c22,28.5) 23,28.5
5V_BUCK on Inner Layer 2 "NETC9" (solid, remove dead copper, pour order 10): 44,25 ccw(c44,26) 45,26 45,62 cw(c47.5,62) 47.5,64.5 ccw(c47.5,65) 48,65 48,70.5 ccw(c47.5,70.5) 47.5,71 43,71 ccw(c43,70.5) 42.5,70.5 42.5,70 42.5,65.5 cw(c41,65.5) 41,64 ccw(c41,62.5) 39.5,62.5 39.5,55 cw(c38.5,55) 38.5,54 30.5,54 cw(c30.5,54.5) 30,54.5 30,58.1 ccw(c29.15,58.1) 29.15,58.95 23.95,58.95 ccw(c23.95,58) 23,58 23,28 cw(c22,28) 22,27 12.5,27 ccw(c12.5,26) 11.5,26 11.5,22 11.5,17 ccw(c12,17) 12,16.5 16.5,16.5 ccw(c16.5,17) 17,17 17,20 29,20 31,20 ccw(c31,21) 32,21 32,24.5 cw(c32.5,24.5) 32.5,25 33.5,25
VADJ2_BUCK on Inner Layer 2 "NETC9" (solid, remove dead copper, pour order 8): 39,63.5 ccw(c39,64.5) 40,64.5 40,70.5 cw(c40.5,70.5) 40.5,71 49,71 cw(c49,70.5) 49.5,70.5 49.5,67.5 ccw(c51,67.5) 51,66 81.5,66 cw(c81.5,65) 82.5,65 82.5,62.5 82.5,6.5 ccw(c83.5,6.5) 83.5,5.5 98.5,5.5 ccw(c98.5,6.5) 99.5,6.5 99.5,43.5 ccw(c98.5,43.5) 98.5,44.5 89.5,44.5 cw(c89.5,45.5) 88.5,45.5 88.5,74 ccw(c87.5,74) 87.5,75 36.54,75 ccw(c36.54,72.46) 34,72.46 34,71.5 cw(c31.5,71.5) 31.5,69 17,69 ccw(c17,68.5) 16.5,68.5 16.5,64.5 ccw(c17.5,64.5) 17.5,63.5
VADJ1_BUCK on Inner Layer 2 "NETC9" (solid, remove dead copper, pour order 5): 98.5,79.5 cw(c98.5,78.5) 99.5,78.5 99.5,46 cw(c99,46) 99,45.5 89.5,45.5 cw(c89.5,46) 89,46 89,75 ccw(c88.75,75) 88.75,75.25 37.5,75.25 cw(c37.5,75.75) 37,75.75 37,78.75 cw(c37.75,78.75) 37.75,79.5
no net on Top Solder "NETC9" (solid): 29.1,22.113 cw(c29.05,22.2) 29,22.287 33.9,25.114 33.9,26.2 cw(c34,26.2) 34,26.3 34.5,26.3 cw(c34.5,26.2) 34.6,26.2 34.6,25.114 39.5,22.287 39.55,22.2 cw(c39.45,22.2) 39.4,22.113 34.25,25.084
no net on Top Solder "NETC9" (solid): 33.9,12.2 33.9,13.25 33.905,13.283 29,16.113 cw(c29.05,16.2) 29.1,16.287 34.25,13.316 39.4,16.287 cw(c39.45,16.2) 39.55,16.2 39.5,16.113 34.595,13.283 34.6,13.25 34.6,12.2 cw(c34.5,12.2) 34.5,12.1 34,12.1 cw(c34,12.2)
no net on Top Solder "NETC9" (solid): 39.35,16.2 39.35,22.2 cw(c39.45,22.2) 39.55,22.2 39.55,19.55 41.25,19.55 cw(c41.25,19.45) 41.35,19.45 41.35,18.95 cw(c41.25,18.95) 41.25,18.85 39.55,18.85 39.55,16.2 cw(c39.45,16.2)
no net on Top Solder "NETC9" (solid): 27.15,18.95 ccw(c27.25,18.95) 27.25,18.85 28.95,18.85 28.95,16.2 ccw(c29.05,16.2) 29.15,16.2 29.15,22.2 ccw(c29.05,22.2) 28.95,22.2 28.95,19.55 27.25,19.55 ccw(c27.25,19.45) 27.15,19.45
no net on Top Solder "NETC9" (solid): 30.877,19.027 33.9,19.027 cw(c33.9,18.9) 34.027,18.9 34.027,15.903 34.053,15.877 34.473,15.877 34.473,18.9 cw(c34.6,18.9) 34.6,19.027 37.623,19.027 37.623,19.373 34.6,19.373 cw(c34.6,19.5) 34.473,19.5 34.473,22.573 34.027,22.573 34.027,19.5 cw(c33.9,19.5) 33.9,19.373 30.877,19.373
GND on Inner Layer 4 "NETC9" (solid, remove dead copper, pour order 38): 108,0 ccw(c108,2) 110,2 110,78 ccw(c108,78) 108,80 2,80 ccw(c2,78) 0,78 0,2 ccw(c2,2) 2,0
20V_USB on Inner Layer 4 "NETC9" (solid, remove dead copper, pour order 2): 14.9,60.5 28.7,60.5 34.5,60.5 ccw(c34.5,61.5) 35.5,61.5 35.5,73 ccw(c34.5,73) 34.5,74 10,74 ccw(c10,73) 9,73 9,61.72 ccw(c10.22,61.72) 10.22,60.5
GND on Inner Layer 3 "NETC9" (solid, remove dead copper, pour order 37): 108,0 ccw(c108,2) 110,2 110,78 ccw(c108,78) 108,80 2,80 ccw(c2,78) 0,78 0,2 ccw(c2,2) 2,0
3V3_BUCK on Inner Layer 3 "NETC9" (solid, remove dead copper, pour order 22): 71,7 cw(c69.5,7) 69.5,5.5 45.54,5.5 cw(c45.54,8.04) 43,8.04 43,23.197 ccw(c40.709,23.197) 40.709,25.488 13.488,25.488 ccw(c13.488,24) 12,24 12,17 ccw(c14,17) 14,15 33.96,15 cw(c33.96,12.46) 36.5,12.46 36.5,3.54 ccw(c39.04,3.54) 39.04,1 98,1 ccw(c98,2.5) 99.5,2.5 99.5,74.5 ccw(c98.5,74.5) 98.5,75.5 87,75.5 ccw(c87,74.5) 86,74.5 86,9.5 cw(c85.5,9.5) 85.5,9 72,9 ccw(c72,8) 71,8
+15V_ANA on Inner Layer 3 "NETC9" (solid, remove dead copper, pour order 20): 43,37.5 cw(c43,36.5) 44,36.5 44,36.25 ccw(c44.5,36.25) 44.5,35.75 60,35.75 ccw(c60,36.5) 60.75,36.5 cw(c61.75,36.5) 61.75,37.5 62.75,37.5 72,37.5 ccw(c72,39) 73.5,39 73.5,58.5 ccw(c72.5,58.5) 72.5,59.5 45,59.5 ccw(c45,58) 43.5,58 43.5,54.5 cw(c42,54.5) 42,53 41.8,53 40.9,53.9 34,53.9 33.1,53 32.167,53 cw(c32.167,53.167) 32,53.167 32,63.5 cw(c32.942,63.5) 32.942,64.442 77.938,64.442 ccw(c77.938,65.505) 79,65.505 79,68.5 ccw(c78,68.5) 78,69.5 32.04,69.5 ccw(c32.04,66.96) 29.5,66.96 29.5,54 cw(c28.5,54) 28.5,53 ccw(c28.5,51.5) 27,51.5 27,44 cw(c26,44) 26,43 23.5,43 ccw(c23.5,42) 22.5,42 22.5,27 ccw(c24,27) 24,25.5 40.46,25.5 cw(c40.46,22.96) 43,22.96 43,7.5 ccw(c44.5,7.5) 44.5,6 62,6 ccw(c62,8) 64,8 64,16.5 ccw(c62.5,16.5) 62.5,18 58.5,18 cw(c58.5,20) 56.5,20 56.5,28.093 ccw(c55.598,28.093) 55.598,28.995 33.906,28.995 cw(c33.906,29.901) 33,29.902 33,37 cw(c33.5,37) 33.5,37.5
3V3_ADJ on Inner Layer 3 "NETC9" (solid, remove dead copper, pour order 17): 51.9,59.5 51.9,64.5 77.5,64.5 cw(c77.5,63) 79,63 79,25 cw(c78,25) 78,24 74.5,24 cw(c74.5,25) 73.5,25 73.5,58.5 ccw(c72.5,58.5) 72.5,59.5
-15V_ANA on Inner Layer 3 "NETC9" (solid, remove dead copper, pour order 19): 65.5,10 cw(c65.5,11.5) 64,11.5 64,16.88 ccw(c62.938,16.88) 62.938,17.942 59.04,17.942 cw(c59.04,20.482) 56.5,20.482 56.5,28 ccw(c55.5,28) 55.5,29 34,29 cw(c34,30) 33,30 33,37 cw(c33.5,37) 33.5,37.5 36,37.5 cw(c36,37) 36.5,37 36.5,34.5 ccw(c37,34.5) 37,34 42.5,34 ccw(c42.5,34.5) 43,34.5 cw(c44,34.5) 44,35.5 59.5,35.5 cw(c59.5,34.5) 60.5,34.5 60.5,25 ccw(c61.5,25) 61.5,24 78,24 ccw(c78,25) 79,25 79,70.5 cw(c80,70.5) 80,71.5 84.5,71.5 cw(c84.5,70.5) 85.5,70.5 85.5,11 cw(c84.5,11) 84.5,10
GND on Inner Layer 1 "NETC9" (solid, remove dead copper, pour order 35): 108,0 ccw(c108,2) 110,2 110,78 ccw(c108,78) 108,80 2,80 ccw(c2,78) 0,78 0,2 ccw(c2,2) 2,0
GND on Bottom Layer "NETC9" (solid, remove dead copper, pour order 39): 108,0 ccw(c108,2) 110,2 110,78 ccw(c108,78) 108,80 2,80 ccw(c2,78) 0,78 0,2 ccw(c2,2) 2,0

## Silkscreen, mask and mechanical layers (free items; w line width, h text height)
Top Overlay:
  drawing of 1286 lines, arcs and shapes, not listed
  text "VADJ1" at 44.9,76.32 h0.6
  text "Made with Love / by Lorenzo" at 79.825,73.4 h3
  text "EN" at 77.128,71 h0.75
  text "3V3" at 84.126,71 h0.75
  text "VADJ2" at 16.9,69.12 h0.6
  text "+20V" at 4.7,65.32 h0.6
  text "+15V" at 52.75,59.02 h0.6
  text "+3V3" at 36,55.72 h0.6
  text "2V5 REF" at 42.101,55.52 h0.6
  text "+5V" at 22.5,53.72 h0.6
  text "-15V" at 31.05,33.62 h0.6
  text "ADC STATUS LEDs" at 58.451,0.995 h0.6
  text "ESP STATUS LEDs" at 26.976,0.645 h0.6
Bottom Overlay:
  drawing of 60 lines, arcs and shapes, not listed
  text "CH 1" at 106.054,62.394 h4 r270
  text "USB PD" at 1.78,60.832 h1 r90
  text "CH 2" at 106.054,45.166 h4 r270
  text "Each CH: / GND / D3 / D2 / A/D1 / VCC" at 98.528,45 h4
  text "CH 3" at 106.054,29.139 h4 r270
  text "USB DAT" at 1.78,25.332 h1 r90
  text "CH 4" at 106.054,13.14 h4 r270
  text "Specs: / VOUT / 3V - 15V / 1A - CH / Fuse Prot." at 98.528,13 h4
Route Tool Path:
  lines w0.2: 0,1.27 ccw(c1.27,1.27) 1.27,0 39,0 108.73,0 ccw(c108.73,1.27) 110,1.27 110,78.73 ccw(c108.73,78.73) 108.73,80 1.27,80 ccw(c1.27,78.73) 0,78.73 0,1.27

## Text inside footprints (layer, text, board x,y; h text height)
U1: Mechanical 13 "ANTENNA" at -2.5,35.5 h1.27 r90
U9: Mechanical 13 "*" at 55.115,34.869 h1.27 r270
U10: Mechanical 13 "*" at 80.832,65.865 h1.27
U11: Mechanical 13 "*" at 80.832,49.532 h1.27
U16: Mechanical 13 "*" at 80.832,15.615 h1.27
U17: Mechanical 13 "*" at 80.832,33.198 h1.27
U23: Mechanical 13 "*" at 67.765,14.668 h1.27 r270